# Altium PCB Pong_Clock_R2.5.PcbDoc
Units mil, origin at the board's own origin, x right, y up, seen from the top; angles counter-clockwise.
Board outline 1489.98 x 1000.51 mil, 2 copper layers (Top Layer, Bottom Layer); 28 components, 21 nets, 131 pads, 27 vias.
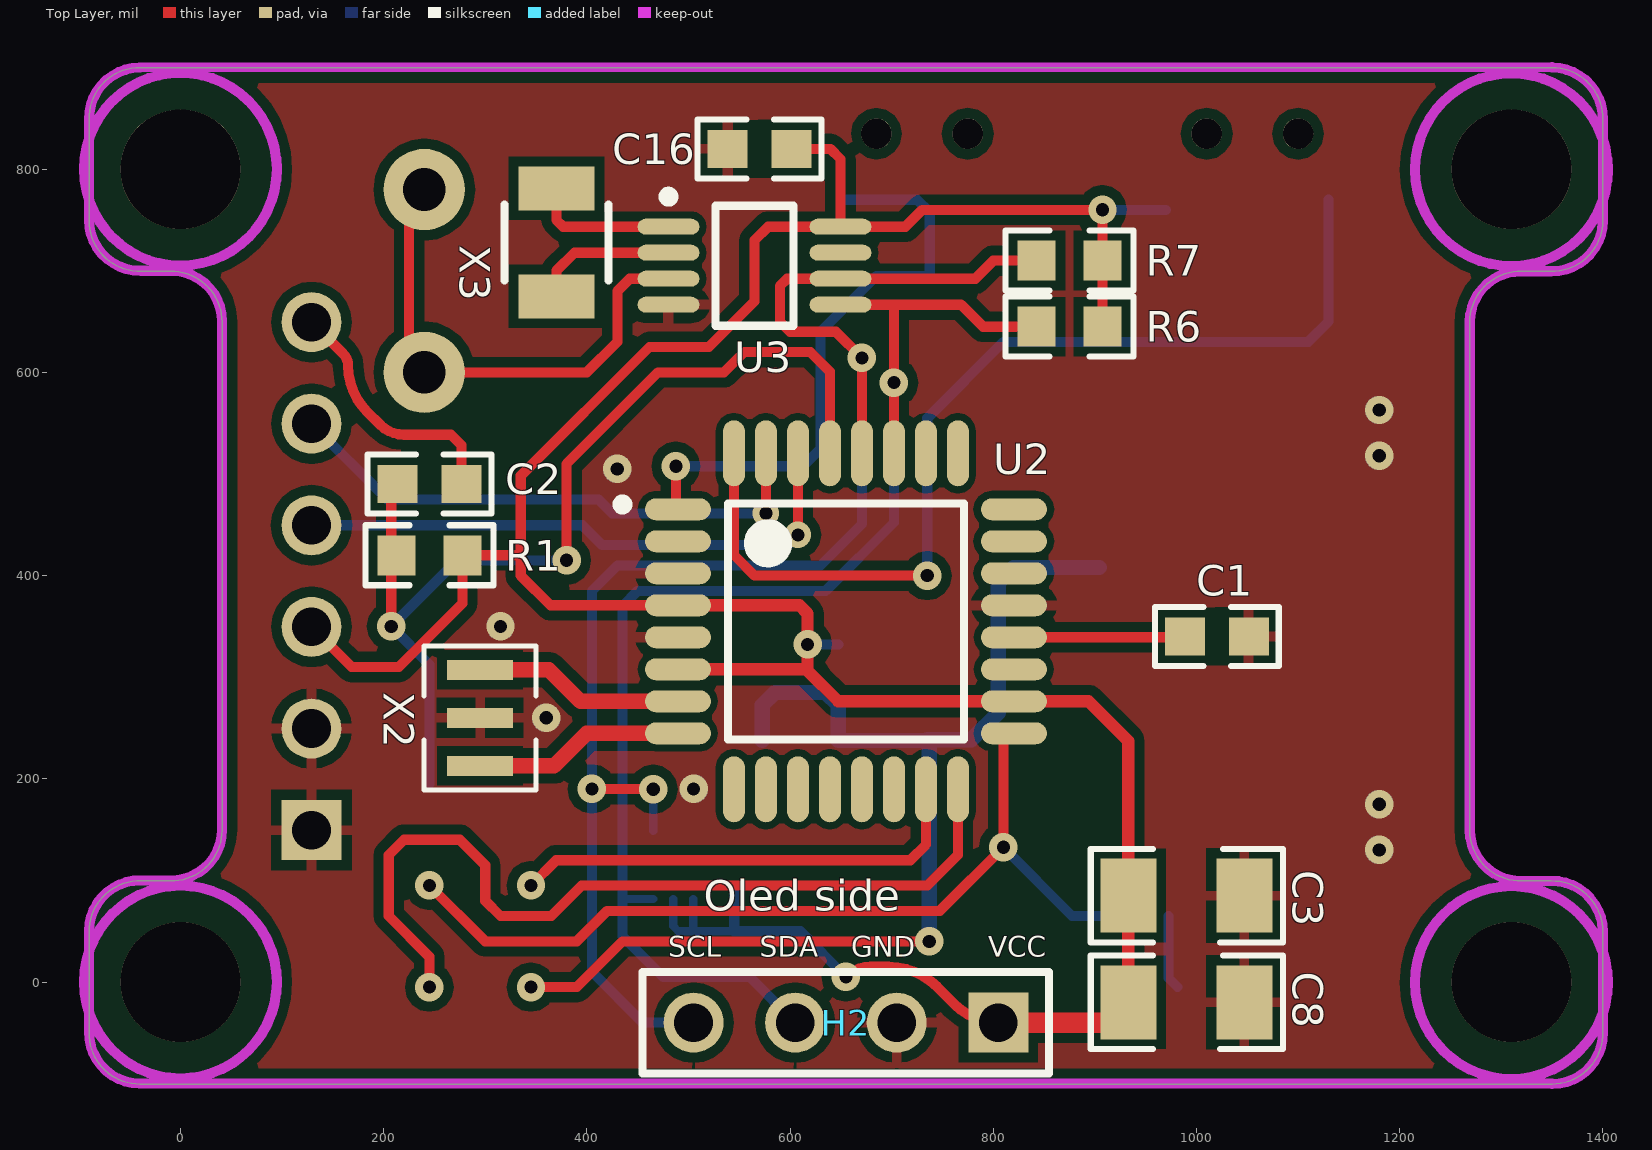
[diagram p0: Top Layer view]
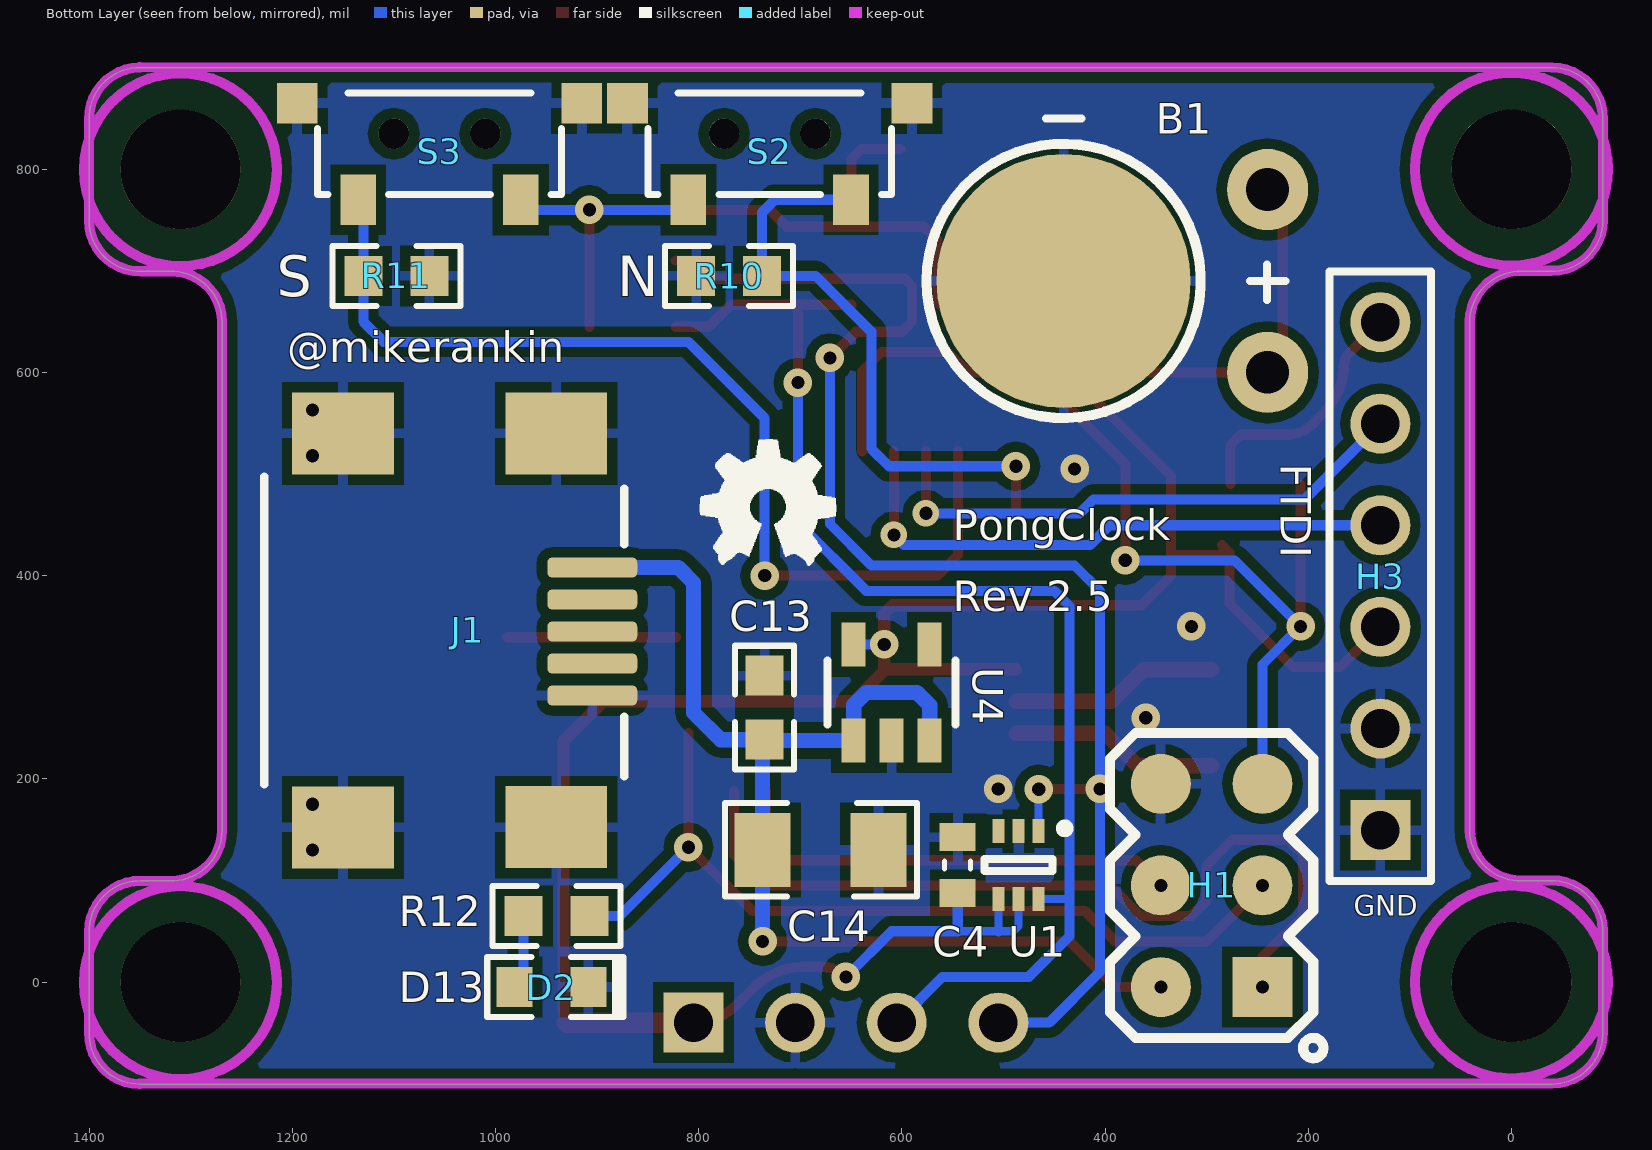
[diagram p1: Bottom Layer view, seen from below]
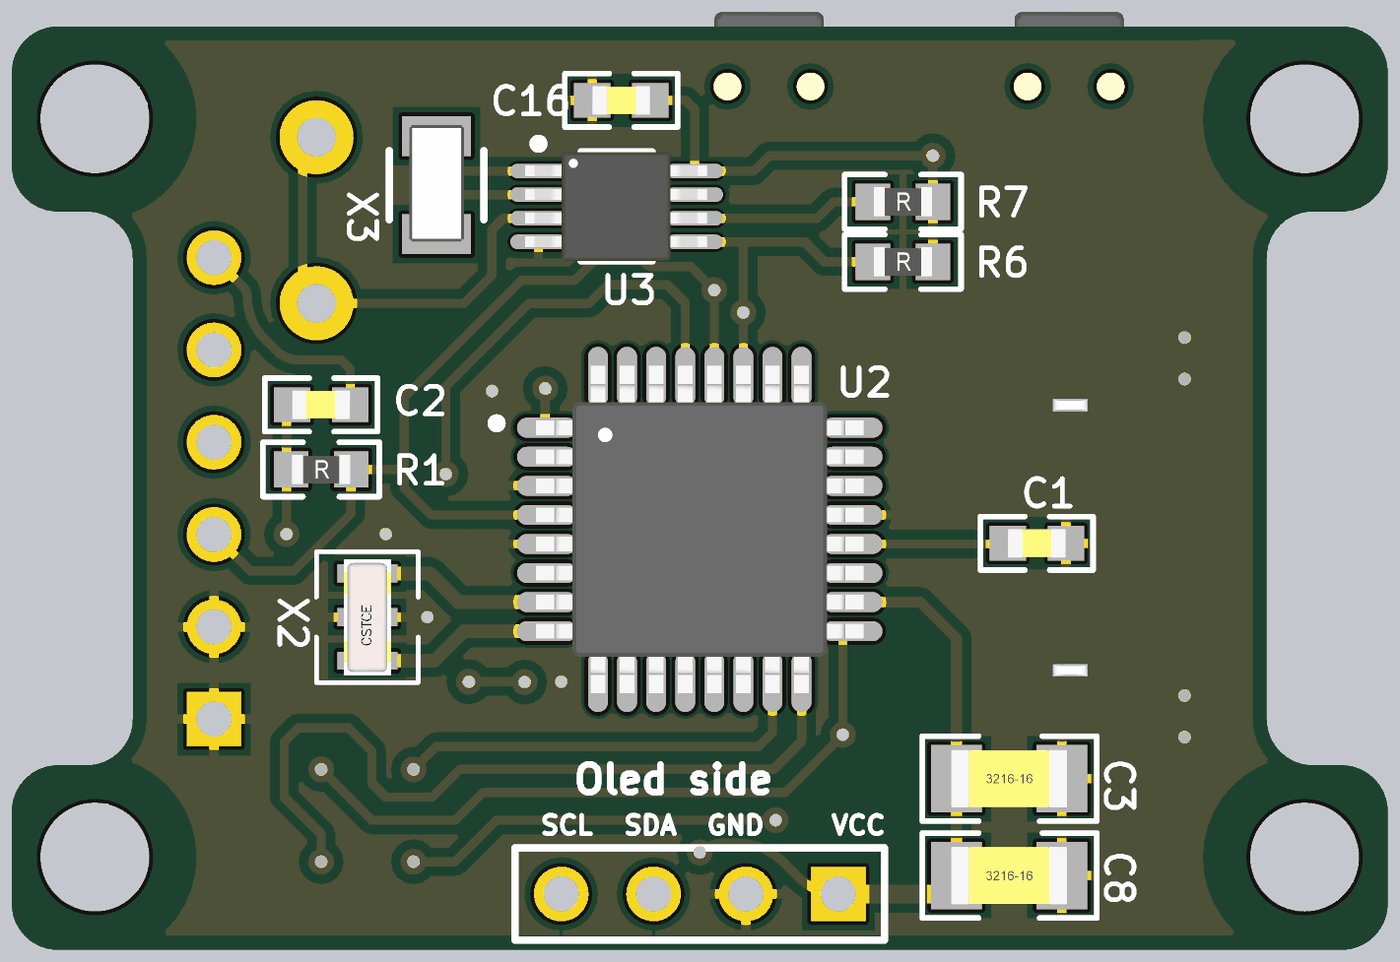
[diagram p2: 3D render of the assembled board from above, using the file's embedded part models]
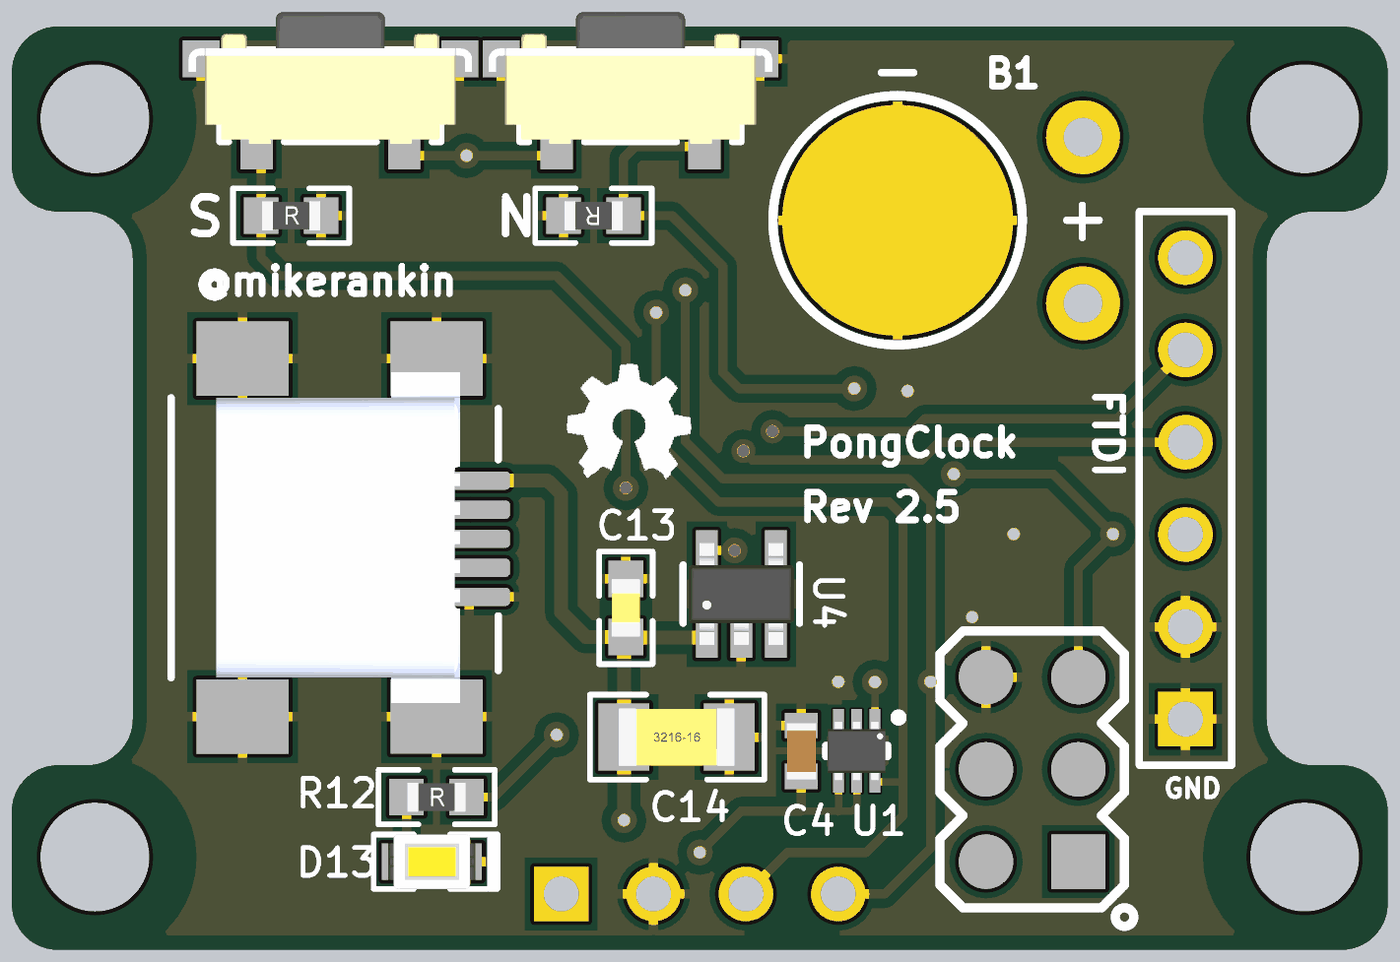
[diagram p3: 3D render of the assembled board from below, using the file's embedded part models]

## Layer stack, top to bottom
Top Solder: solder mask 0.4, Solder Resist, Dk 3.5
Top Layer: signal copper 1.4
Dielectric1: dielectric 12.6, FR-4, Dk 4.8
Bottom Layer: signal copper 1.4
Bottom Solder: solder mask 0.4, Solder Resist, Dk 3.5

## Board outline
-89.99,-49.48 ccw(c-40,-50.48) -40,-100.48 -40,-100.47 1325,-100.49 1350,-100.49 ccw(c1350,-50.49) 1399.99,-49.49 1399.99,49.51 ccw(c1349.99,49.51) 1348.99,99.5 1320,99.5 cw(c1319,149.49) 1269,149.49 1269,649.5 cw(c1319,649.5) 1320,699.49 1348.99,699.49 ccw(c1349.99,749.48) 1399.99,749.48 1399.99,849 ccw(c1350,850) 1350,900 -40,900.02 ccw(c-40,850.02) -89.99,849.02 -89.99,749.47 ccw(c-39.99,749.47) -38.99,699.48 -10,699.48 -10,699.47 cw(c-9,649.48) 41,649.48 41,149.5 cw(c-9,149.5) -10,99.51 -38.99,99.51 ccw(c-39.99,49.52) -89.99,49.52

## Design rules (kind name [scope] priority, off if disabled: settings)
Clearance temp_ic [InComponent('U1')] p1: gap=5
Clearance U3_clearance [InComponent('U3')] p2: gap=7
Clearance U2_clearance [InComponent('U2')] p3: gap=7
Clearance [All] p4: gap=10
HoleSize [All] p1: absolutevalues=TRUE maxlimit=150 minlimit=13 maxpercent=80.000 minpercent=20.000
MinimumSolderMaskSliver [All] p1: minsoldermaskwidth=5
PlaneConnect Via_No_Relief [(IsVia)] p1: planeconnectstyle=Direct reliefexpansion=20 reliefentries=4 reliefconductorwidth=10 reliefairgap=10
PlaneConnect [All] p2: planeconnectstyle=Relief reliefexpansion=20 reliefentries=4 reliefconductorwidth=10 reliefairgap=10
PolygonConnect No_Relief [(IsVia)] p1: connectstyle=Direct reliefconductorwidth=10 reliefentries=4 polygonreliefangle="90 Angle" airgapwidth=10
PolygonConnect [All] p2: connectstyle=Relief reliefconductorwidth=10 reliefentries=4 polygonreliefangle="90 Angle" airgapwidth=10
RoutingVias [All] p1: holewidth=13 width=28 viastyle="Through Hole" minholewidth=13 minwidth=28 maxholewidth=13 maxwidth=28
SilkToSilkClearance [All] p1: silktosilkclearance=3
SilkToSolderMaskClearance [IsPad] p1: minsilkscreentomaskgap=5 clearancetoexposedcopper=TRUE
SolderMaskExpansion [All] p1: expansion=4
UnpouredPolygon [All] p1: allowunpoured=FALSE
Width [All] p1: maxlimit=50 minlimit=8 preferedwidth=10
24 further rules are at their usual default settings.

## Components (designator, comment, footprint, x,y, rotation, side; value= is the part's Value field where it differs from the comment)
B1 "CR377" "CR377 Mount" 440.73,690 r180 bottom
C1 "0.1uF" CAPC1608X90N 1020,340 r180 top
C2 "0.1uF" CAPC1608X90N 245,490.01 r180 top
C3 "" CAPC3216X160N 990,85.01 r0 top
C4 "0.1uF" CAPC1608X09L 545,115 r270 bottom
C8 "" CAPC3216X160N 990,-19.99 r0 top
C13 "0.1uF" CAPC1608X90N 735,270 r90 bottom
C14 "" CAPC3216X160N 680,130 r180 bottom
C16 "0.1uF" CAPC1608X90N 570,820 r180 top
D2 "LED_0603" LED1608X55N-YELLOW 945,-4.99 r0 bottom
H1 "CON3X2" HDR3X2 295,95.01 r90 bottom
H2 "TSW-104-07-L-S" HDR1X4-Empty 655,-39.99 r180 top (schematic designator H1)
H3 "CON6" HDR1X6 128.98,399.51 r90 bottom
J1 "USB_DX" USB_DX 1010,345.01 r180 bottom
R1 "10K" RESC1608X55N 245,420.01 r0 top
R6 "4.7K" RESC1608X55N 875,645 r0 top
R7 "4.7K" RESC1608X55N 875,710 r0 top
R10 "10K" RESC1608X55N 770,695 r0 bottom
R11 "10K" RESC1608X55N 1097.52,695 r180 bottom
R12 "1K" RESC1608X55N 940,65.01 r180 bottom
S2 "PPushButton" "SWITCH TACTILE RA- DX" 730,790 r0 bottom
S3 "PPushButton" "SWITCH TACTILE RA- DX" 1055,790 r0 bottom
U1 "TMP102AIDRL" SOT50P150X130-6N 485,115 r270 bottom
U2 "ATMEGA328" TQFP80P700X700-32N 655,355.01 r0 top
U3 "DS1340U-33+" TSOP65P490X110-8N 565,705.01 r0 top
U4 "LP2985-33DBVR" SOT95P280X144-5N 610,285 r90 bottom
X2 "8Mhz" CSTCE 295,260.01 r90 top
X3 "32Khz Crystal" ECS-.327-12.5-34B 370,730.01 r270 top

## Footprints (in the part's own frame and the unit in brackets; to place one, negate y for a bottom-side part, rotate by r counter-clockwise, add the part's x,y. Pads: shape width x height; smd on the part's side, far side on the other; paste and mask are expansions set on the pad)
CAPC1608X09L [mm] "Chip Capacitor, 2-Leads, Body 1.6x0.8mm, IPC High Density (0603 dense)"
  rect 0.7x0.9 smd: 1(-0.7,0) 2(0.7,0)
  silkscreen extent -0.1,-0.33 0.1,0.33, body extent -0.88,-0.48 0.87,0.48, height 1.03
CAPC1608X90N [mm] "Chip Capacitor, 2-Leads, Body 1.6x0.8mm, IPC Medium Density (0603)"
  rect 1x0.95 smd: 1(-0.8,0) 2(0.8,0)
  silkscreen extent -1.55,-0.74 1.55,0.74, body extent -0.8,-0.4 0.8,0.4, height 0.79
CAPC3216X160N [mm] "Chip Capacitor, 2-Leads, Body 3.2x1.6mm, IPC Medium Density(C1206)"
  rect 1.4x1.85 smd: 1(-1.45,0) 2(1.45,0)
  silkscreen extent -2.39,-1.17 2.41,1.17, body extent -1.6,-0.8 1.6,0.8, height 1.89
"CR377 Mount" [mil] "CR377 Mount"
  round 80 hole 42: 1(200.73,-90) 1(200.73,90)
  round 250 smd paste-200: 2(0,0)
  silkscreen extent -135,-135 218,160
CSTCE [mm] "SMT Crystal 3-Leads, Body 3.2x1.3mm"
  rect 0.5x1.651 smd: 1(1.2,0) 2(0,0) 3(-1.2,0)
  silkscreen extent -1.8,-1.4 1.8,1.4, body extent -1.61,-0.65 1.59,0.65, height 1.01
ECS-.327-12.5-34B [mm] "SMT Crystal, 2-Leads, Body 3.2x1.5mm, IPC Medium Density"
  rect 1.1x1.9 smd: 1(-1.3,0) 2(1.4,0)
  silkscreen extent -0.9,-1.3 1,1.3, body extent -1.6,-0.75 1.6,0.75, height 0.91
HDR1X4-Empty [mm]
  rect 1.5x1.5 hole 0.965: 1(-3.81,0)
  round 1.5 hole 0.965: 2(-1.27,0) 3(1.27,0) 4(3.81,0)
  silkscreen extent -5.08,-1.27 5.08,1.27
HDR1X6 [mm]
  rect 1.5x1.5 hole 0.965: 1(-6.35,0)
  round 1.5 hole 0.965: 2(-3.81,0) 3(-1.27,0) 4(1.27,0) 5(3.81,0) 6(6.35,0)
  silkscreen extent -7.62,-1.27 7.62,1.27
HDR3X2 [mm]
  rect 1.5x1.5 smd: 1(-2.54,-1.27)
  round 1.5 smd: 2(-2.54,1.27) 3(0,-1.27) 4(0,1.27) 5(2.54,-1.27) 6(2.54,1.27)
  silkscreen extent -4.32,-2.79 3.81,2.54
LED1608X55N-YELLOW [mm] "Chip LED YELLOW, 2-Leads, Body 1.6x0.8mm, IPC Medium Density (0603 med)"
  rect 0.9x1 smd: 1(-0.925,0) 2(0.925,0)
  silkscreen extent -1.8,-0.75 1.6,0.75, body extent -1.2,-0.75 1.2,0.75, height 1.4
RESC1608X55N [mm] "Chip Resistor, 2-Leads, Body 1.6x0.8mm, IPC Medium Density (0603 med)"
  rect 0.95x1 smd: 1(-0.825,0) 2(0.825,0)
  silkscreen extent -1.6,-0.75 1.6,0.75, body extent -0.8,-0.4 0.8,0.4, height 0.54
SOT50P150X130-6N [mm] "SOT-563, 6-Leads, Body 1.5x1.3mm (max), Pitch 0.50mm, IPC Medium Density"
  rect 0.6x0.3 smd mask+0.051: 1(-0.85,0.5) 2(-0.85,0) 3(-0.85,-0.5) 4(0.85,-0.5) 5(0.85,0) 6(0.85,0.5)
  silkscreen extent -1.01,-0.85 0.15,1.24, body extent -0.81,-0.8 0.81,0.8, height 0.59
SOT95P280X144-5N [mm] "SOT23, 5-Leads, Body 3.1x3.0mm (max), Pitch 0.95mm, IPC Medium Density (RFMD SOT23-5)"
  rect 1.1x0.6 smd: 1(-1.2,0.95) 2(-1.2,0) 3(-1.2,-0.95) 4(1.2,-0.95) 5(1.2,0.95)
  silkscreen extent -0.8,-1.6 0.8,1.6, body extent -1.4,-1.45 1.4,1.45, height 1.45
"SWITCH TACTILE RA- DX" [mil] "SWITCH TACTILE RA- DX"
  rect 35x50 smd: 1(-80,20) 2(80,20)
  rect 40x40 smd: ""(-140,-75) ""(140,-75)
  round 30 hole 30 unplated: ""(-45,-45) ""(45,-45)
  silkscreen extent -120,-85 120,15, body extent -154,-126 154,17, height 134
TQFP80P700X700-32N [mm] "TQFP 0.80mm pitch 32 pins"
  oval 1.65x0.55 smd: 1(-4.2,2.8) 2(-4.2,2) 3(-4.2,1.2) 4(-4.2,0.4) 5(-4.2,-0.4) 6(-4.2,-1.2) 7(-4.2,-2) 8(-4.2,-2.8) 17(4.2,-2.8) 18(4.2,-2) 19(4.2,-1.2) 20(4.2,-0.4) 21(4.2,0.4) 22(4.2,1.2) 23(4.2,2) 24(4.2,2.8)
  oval 0.55x1.65 smd: 9(-2.8,-4.2) 10(-2,-4.2) 11(-1.2,-4.2) 12(-0.4,-4.2) 13(0.4,-4.2) 14(1.2,-4.2) 15(2,-4.2) 16(2.8,-4.2) 25(2.8,4.2) 26(2,4.2) 27(1.2,4.2) 28(0.4,4.2) 29(-0.4,4.2) 30(-1.2,4.2) 31(-2,4.2) 32(-2.8,4.2)
  silkscreen extent -5.71,-2.95 2.95,3.05, body extent -4.51,-4.51 4.51,4.51, height 1.13
TSOP65P490X110-8N [mm] "TSOP, 8-Leads, Body 3.0x3.0mm (max), Pitch 0.65mm, IPC Medium Density"
  oval 1.55x0.4 smd mask+0.076: 1(-2.15,0.975) 2(-2.15,0.325) 3(-2.15,-0.325) 4(-2.15,-0.975) 5(2.15,-0.975) 6(2.15,-0.325) 7(2.15,0.325) 8(2.15,0.975)
  silkscreen extent -2.27,-1.5 0.97,1.85, body extent -2.51,-1.5 2.49,1.5, height 1.1
USB_DX [mm] "CONN RECEPT MINIUSB R/A 5POS SMD"
  rrect50% 2.25x0.5 smd: 1(2.675,1.6) 2(2.675,0.8) 3(2.675,0) 4(2.675,-0.8) 5(2.675,-1.6)
  rect 2.54x2.05 smd: ""(-3.556,-4.897) ""(-3.556,4.953) ""(1.778,-4.894) ""(1.778,4.953)
  silkscreen extent -5.53,-3.82 3.47,3.88, body extent -4.28,-4.52 2.42,4.58, height 4.05

## Part data
B1: "Custom CR377 mount"
C1 C2: library part CAP_0603, "CAP CER 0.1uF, 0603"
C3 C8 C14: library part CAP_1206, "CAP_1206"
C4: library part "Cap Semi", "CAP CER 0.1UF 50V 10% X7R 0603"
C13: library part CAP_0603, "CAP 0603"
C16: library part CAP_0603, "CAP CER 0.1uF 0603"
H1: "CONN HEADER 3X2POS .100\" PADS"
H2: "CONN HEADER 4POS .100\" SGL GOLD"
H3: "CONN HEADER 6POS .100\" PADS"
J1: "CONN RECEPT MINIUSB R/A 5POS SMD"
R1 R6 R7: library part RES_0603, "RES 10K, 0603"
R10 R11: library part RES_0603, "RES 10K 0603"
R12: library part RES_0603, "RES 330R, 0603"
S2 S3: library part DX_MINI_TACT_SWITCH_RA, "DX_MINI_TACT_SWITCH_RA"
U1: "IC DGTL TEMP SENSOR LP SOT-563"
U2: library part ATMEGA328-AUR, "MCU AVR 32K FLASH 32TQFP"
U3: "IC RTC SERIAL 512K 8-TSSOP"
U4: "IC REG LDO 3.3V .15A SOT23-5"
X2: library part CSTCE8M00G55-R0, "CER RESONATOR 8.0MHZ SMD"
X3: library part ECS-.327-12.5-34B, "CRYSTAL 32.768 KHZ 12.5PF SMD"

## Free pads (board coordinates)
  round 250 on Bottom Solder: 0(440,690)
  round 118 hole 118 unplated: ""(0,0) ""(0,800) ""(1310,-0.01) ""(1310,799.99)

## Via types
v1: diameter 28, hole 13, Top Layer to Bottom Layer, tented both sides, 17 vias
v2: diameter 28, hole 13, Top Layer to Bottom Layer, tented top, 8 vias
v3: diameter 26, hole 13, Top Layer to Bottom Layer, tented both sides, 2 vias

## Nets (pads, with @x,y where several pads share a name; then routed paths per layer and width w, separated by ;. In a path a pad name is that pad's centre, name@x,y a point inside that pad or via, vN(x,y) a via of type N, cw(c..) or ccw(c..) an arc to the next point about the centre after c; other vN are vias at no path point)
GND: B1.2 C1.1 C3.2 C4.1 C8.2 C13.2 C14.2 C16.2 D2.1 H1.6 H2.2 H3.1 H3.2 J1. J1.5 R10.2 R11.2 S2.@590,865 S2.@870,865 S3.@915,865 S3.@1195,865 U1.2 U2.3 U2.5 U2.21 U3.4 U4.2 X2.2
  other v1: 505,190 360,260.01 315,350.01 430,505
  other v2: 1180,130.01 1180,175.01 1180,518.01 1180,563.01
NetB1_1: B1.1 U3.3 | length 502.8
  Top Layer w10: B1.1@225,780 225,600.01 400.01,600.01 430,630 430,680.01 442.2,692.21 U3.3
NetC1_2: C1.2 U2.20 | length 166.2
  Top Layer w10: U2.20@822.32,339.26 C1.2@988.5,339.26
NetC2_1: C2.1 H3.6 | length 250.8
  Top Layer w10: H3.6 160.28,618.2 cw(c148.89,606.81) 165,606.81 ccw(c229.73,606.81) 183.96,561.04 196.59,548.41 ccw(c220,571.81) 220,538.71 266.3,538.71 276.5,528.51 C2.1
NetC2_2: C2.2 H1.5 R1.1 U2.29 | length 995.6
  Top Layer w10: v1(207.52,350.01) C2.2@207.52,489.51 ; v1(380,415.01) 380,510 470,600 534.99,600 555,620.01 620,620.01 639.25,600.76 U2.29@639.25,522.33
  Bottom Layer w10: H1.5 245,312.53 v1(207.52,350.01) 272.52,415.01 v1(380,415.01)
NetD2_2: D2.2 R12.1 | length 73.7
  Bottom Layer w10: R12.1 972.48,3.95 D2.2
NetH1_1: H1.1 U2.16 | length 852
  Top Layer w10: v2(245,-4.99) 245,25.01 205,65.01 205,125.01 220,140.01 275,140.01 300,115.01 300,80.01 315,65.01 365,65.01 395,95.01 735,95.01 765.24,125.25 U2.16@765.24,187.69
NetH1_3: H1.3 R12.2 U2.17 | length 896
  Top Layer w10: v2(245,95.01) 300,40.01 390,40.01 419.99,70 747.43,70 ; 770,92.57 747.43,70 ; U2.17@810,245.01 v1(810,132.57) 747.43,70
  Bottom Layer w10: v1(810,132.57) 877.56,65.01 R12.2
NetH1_4: H1.4 U2.15 | length 457.9
  Top Layer w10: v2(345,95.01) 369.88,119.89 718.45,119.89 733.74,135.19 U2.15@733.74,187.69
NetH2_3: H2.3 R6.1 U1.6 U2.27 U3.5 | length 1325.7
  Top Layer w10: U3.5 702.24,666.62 ; U2.27@702.24,522.33 v1(702.24,590.01) 702.24,666.62 ; 822.52,645.01 790,645.01 768.39,666.62 702.24,666.62
  Bottom Layer w8: 435,81.54 U1.6
  Bottom Layer w10: H2.3 560,5.01 475,5.01 435,45.01 435,81.54 435,370.01 450,385.01 635,385.01 702.24,452.25 v1(702.24,590.01)
NetH2_4: H2.4 R7.1 U1.1 U2.28 U3.6 | length 1519.2
  Top Layer w10: v1(405,190) 465,190 v1(465.31,189.69) ; U2.28@670.75,522.33 v1(670.75,614.26) 645,640.01 600,640.01 590,650.01 590,685.01 597.2,692.21 U3.6 782.21,692.21 800,710 822.52,710
  Bottom Layer w8: U1.1 v1(465.31,189.69)
  Bottom Layer w10: H2.4 455,-39.99 405,10.01 405,385.01 430,410.01 630,410.01 670.75,450.76 v1(670.75,614.26)
NetH3_4: H3.4 U2.30 | length 573.3
  Top Layer w10: v3(607.76,440.01) U2.30@607.76,522.33
  Bottom Layer w10: H3.4 395.5,449.51 415,430.01 597.76,430.01 v3(607.76,440.01)
NetH3_5: H3.5 U2.31 | length 550.2
  Top Layer w10: v3(576.26,461.27) U2.31@576.26,522.33
  Bottom Layer w10: H3.5 203.47,475.01 411.26,475.01 425,461.27 v3(576.26,461.27) v3@572.52,465.01
NetR10_1: R10.1 S2.1 U2.1 | length 592.4
  Top Layer w10: U2.1@487.68,465.25 v1(487.68,507.68)
  Bottom Layer w10: v1(487.68,507.68) 612.68,507.68 630,525 630,640 685,695 R10.1 737.52,757.48 725,770 S2.1
NetR11_1: R11.1 S3.2 U2.32 | length 1010
  Top Layer w10: U2.32@544.76,522.33 544.76,420.24 565,400 v1(735,400)
  Bottom Layer w10: v1(735,400) 735,554.93 810.08,630.01 1110.01,630.01 1130,650 R11.1 S3.2@1130,770
NetU2_7: U2.7 X2.1 | length 208.7
  Top Layer w10: X2.1 X2.1@297.24,305.01
  Top Layer w15: X2.1 362.76,307.25 393.74,276.27 U2.7@487.68,276.27
NetU2_8: U2.8 X2.3 | length 205.9
  Top Layer w15: X2.3 367.76,212.77 399.76,244.77 U2.8@487.68,244.77
NetU3_1: U3.1 X3.1 | length 144.3
  Top Layer w10: X3.1 370,750.01 376.61,743.4 U3.1
NetU3_2: U3.2 X3.2 | length 142.8
  Top Layer w10: X3.2 370,700.01 387.79,717.81 U3.2
VCC: C3.1 C4.2 C8.1 C16.1 H2.1 H3.3 R1.2 R6.2 R7.2 S2.2 S3.1 U1.4 U1.5 U2.4 U2.6 U2.18 U3.8 U4.5 | length 3223.7
  Top Layer w10: H3.3 168.47,310.01 215,310.01 277.48,372.49 277.48,422.49 R1.2@285,430.01 ; R1.2 335,420.01 ; U2.4@487.68,370.76 364.25,370.76 335,400.01 335,420.01 ; C16.1 639.65,820 649.65,810 U3.8 ; v1(655,5) cw(c679.14,-19.14) 679.14,15 696.72,15 cw(c696.72,-53.28) 745,-5 762.31,-22.31 ccw(c805,20.39) H2.1 ; R6.2 v1(907.5,760) 730,760 713.4,743.4 U3.8 ; 335,420.01 335,498.38 461.62,625 519.99,625 565,670.01 565,730.01 578.39,743.4 U3.8
  Top Layer w12: U2.6@487.68,307.77 617.24,307.77 ; U2.4@487.68,370.76 609.24,370.76 617.24,362.76 v1(617.24,332.24) 617.24,306.38 647.35,276.27 893.74,276.27 932.91,237.1 C8.1@932.91,-29.99
  Top Layer w20: H2.1 C8.1@930,-39.99
  Bottom Layer w8: U1.5 485,55 490,50 505,50 545,50 ; 504.69,50.31 U1.4
  Bottom Layer w10: 504.69,50.31 505,50 ; C4.2 545,50 610,50 v1(655,5) ; v1(617.24,332.24) U4.5 ; S2.2@810,760 v1(907.5,760) S3.1@970,760
VUSB: C13.1 C14.1 H1.2 J1.1 U4.1 U4.3 | length 1167.6
  Top Layer w10: v2(345,-4.99) 390,-4.99 435,40.01 v1(737.09,40)
  Bottom Layer w10: C13.1@734.25,237.76 C13.1 C13.1@737.09,236.42
  Bottom Layer w15: U4.3 572.6,272.6 585,285 635,285 647.4,272.6 U4.1 C13.1@734.25,237.76 ; C13.1 778.5,238.5 805,265 805,393 820,408 J1.1 ; v1(737.09,40) C14.1 C13.1@737.09,236.42
pads on no net: J1.2 J1.3 J1.4 S2.@685,835 S2.@775,835 S3.@1010,835 S3.@1100,835 U1.3 U2.2 U2.9 U2.10 U2.11 U2.12 U2.13 U2.14 U2.19 U2.22 U2.23 U2.24 U2.25 U2.26 U3.7 U4.4

## Polygon pours and split planes (outlines as drawn)
GND on Top Layer "Top Layer-No Net" (solid, remove dead copper, pour order 2): 0,900.01 1310,900.01 1310,-99.99 0,-99.99 0,900.01
GND on Bottom Layer "Bottom Layer-No Net" (solid, remove dead copper, pour order 4): -5,900.01 1310,900.01 1310,-99.99 -5,-99.99 -5,900.01

## Keep-outs
Keep-Out Layer:
  circle w10: c1310,-0.54 r94.87
  circle w10: c0,0.02 r94.87
  circle w10: c1310,799.46 r94.87
  circle w10: c0,800.02 r94.87
  lines w10: 41,650.03 ccw(c-9,650.03) -10,700.02 -38.99,700.03 cw(c-39.99,750.02) -89.99,750.02 -89.99,849.02 cw(c-40,850.02) -40,900.02 1350,900.57 ; 41,650.06 41,150.05 cw(c-9,150.05) -10,100.06 -38.99,100.06 ccw(c-39.99,50.07) -89.99,50.07 -89.99,-48.93 ccw(c-40,-49.93) -40,-99.93 1350,-99.96 ; 1350,-100.49 ccw(c1350,-50.49) 1399.99,-49.49 1399.99,49.51 ccw(c1349.99,49.51) 1348.99,99.5 1320,99.5 cw(c1319,149.49) 1269,149.49 1269,649.5 cw(c1319,649.5) 1320,699.49 1348.99,699.49 ccw(c1349.99,749.48) 1399.99,749.48 1399.99,849 ccw(c1350,850) 1350,900

## Silkscreen, mask and mechanical layers (free items; w line width, h text height)
Top Overlay:
  text "Oled side" at 515,70 h30
  text "SCL" at 480,25 h20
  text "SDA" at 570,25 h20
  text "GND" at 660,25 h20
  text "VCC" at 795,25 h20
Bottom Overlay:
  region: 697 vertices and 0 holes, not listed, extent 664.33,409.89 798.92,534.3
  text "N" at 880,675 h40
  text "S" at 1215,675 h40
  text "@mikerankin" at 1205,610.01 h30
  text "FTDI" at 227,510.01 h30 r90
  text "PongClock" at 550,435 h30
  text "Rev 2.5" at 550,365 h30
  text "GND" at 155,65 h20
  text "D13" at 1095,-20 h30
Mechanical 1:
  lines w10: -89.99,848.47 -89.99,749.47 ccw(c-39.99,749.47) -38.99,699.48 -10,699.48 cw(c-9,649.48) 41,649.48 ; -89.99,849.02 cw(c-40,850.02) -40,900.02 1350,900 cw(c1350,850) 1399.99,849 1399.99,749.48 cw(c1349.99,749.48) 1348.99,699.49 1320,699.49 ccw(c1319,649.5) 1269,649.5 1269,149.49 ccw(c1319,149.49) 1320,99.5 1348.99,99.5 cw(c1349.99,49.51) 1399.99,49.51 1399.99,-49.49 cw(c1350,-50.49) 1350,-100.49 1325,-100.49 -40,-100.47 cw(c-40,-50.48) -89.99,-49.48 -89.99,49.52 cw(c-39.99,49.52) -38.99,99.51 -10,99.51 ccw(c-9,149.5) 41,149.5 41,649.51
Top Assembly:
  lines w4: 330,646.01 410,646.01 410,811.01 330,811.01 330,646.01
  text "X3" at 352,720.01 h20
  text "U2" at 634,343.01 h20

## Text inside footprints (layer, text, board x,y; h text height)
J1: Bottom Assembly "PCB EDGE" at 1179.68,228 h30 r270